# Altium PCB PCB Sensor Sentuh kapasitif 6.PcbDoc
Units mm, origin at the board's own origin, x right, y up, seen from the top; angles counter-clockwise.
Board outline 68.48 x 42.47 mm, 2 copper layers (Top Layer, Bottom Layer), stack 1.671 mm thick; 26 components, 32 nets, 106 pads, 31 vias.
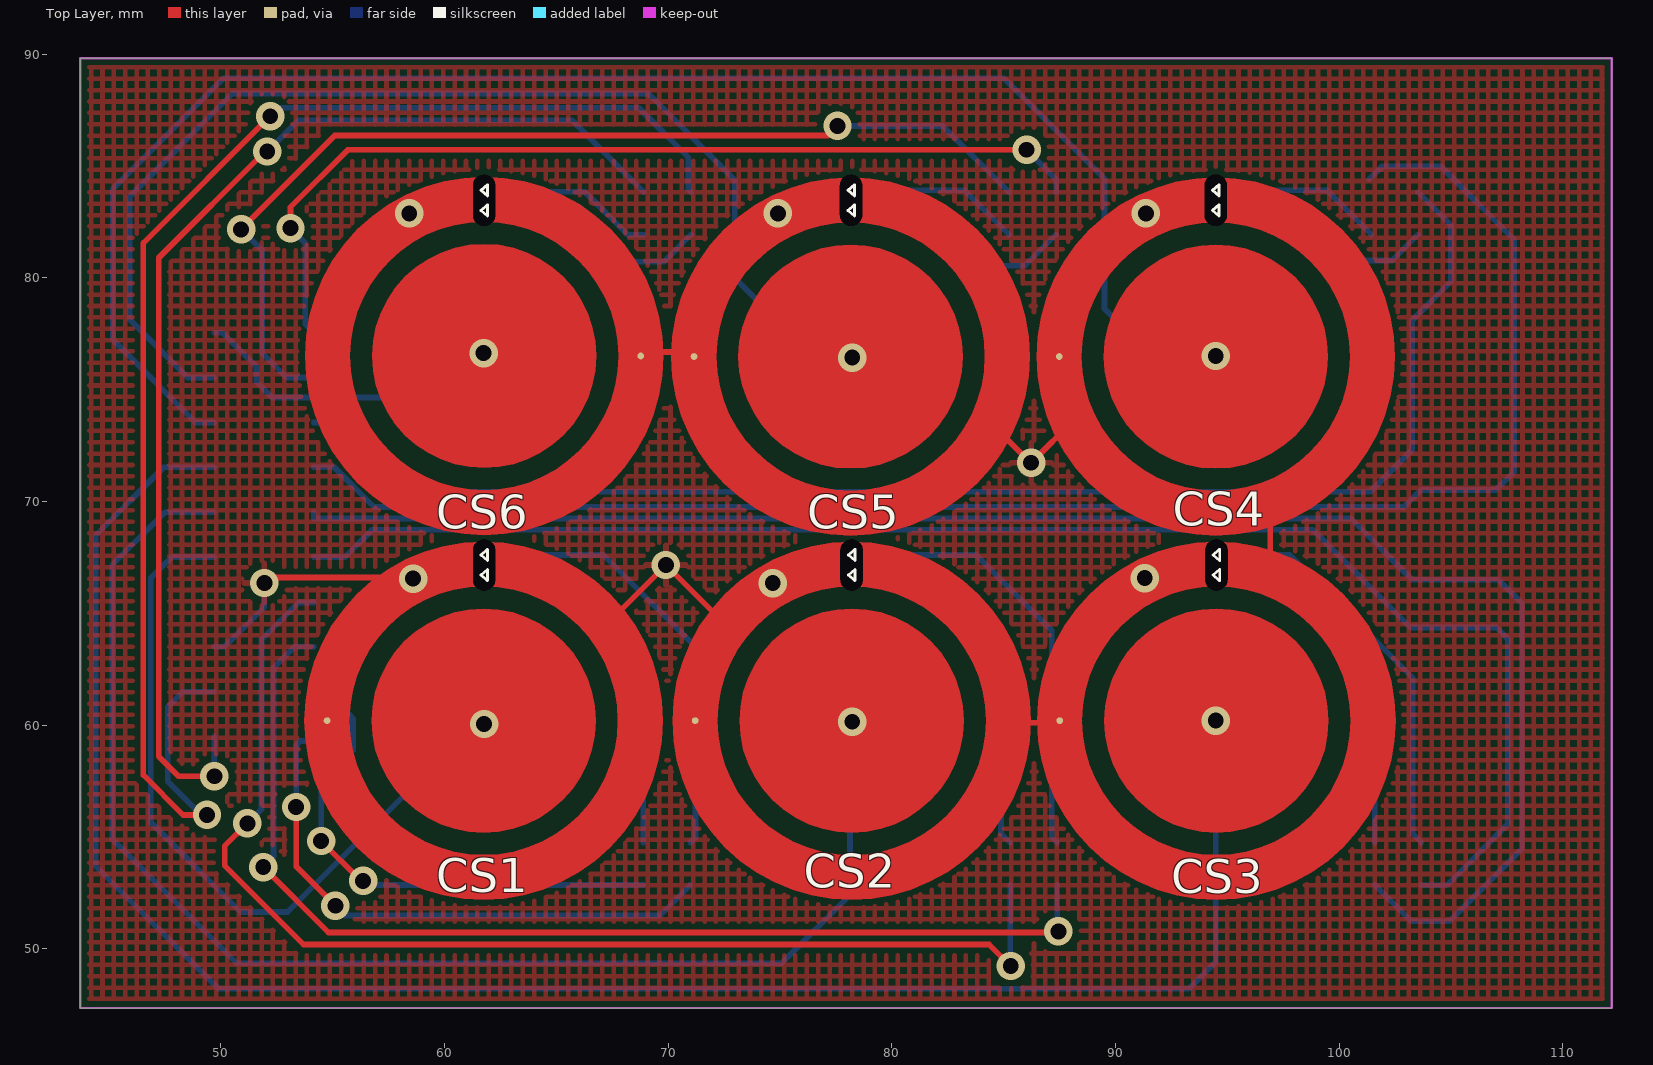
[diagram p0: Top Layer view]
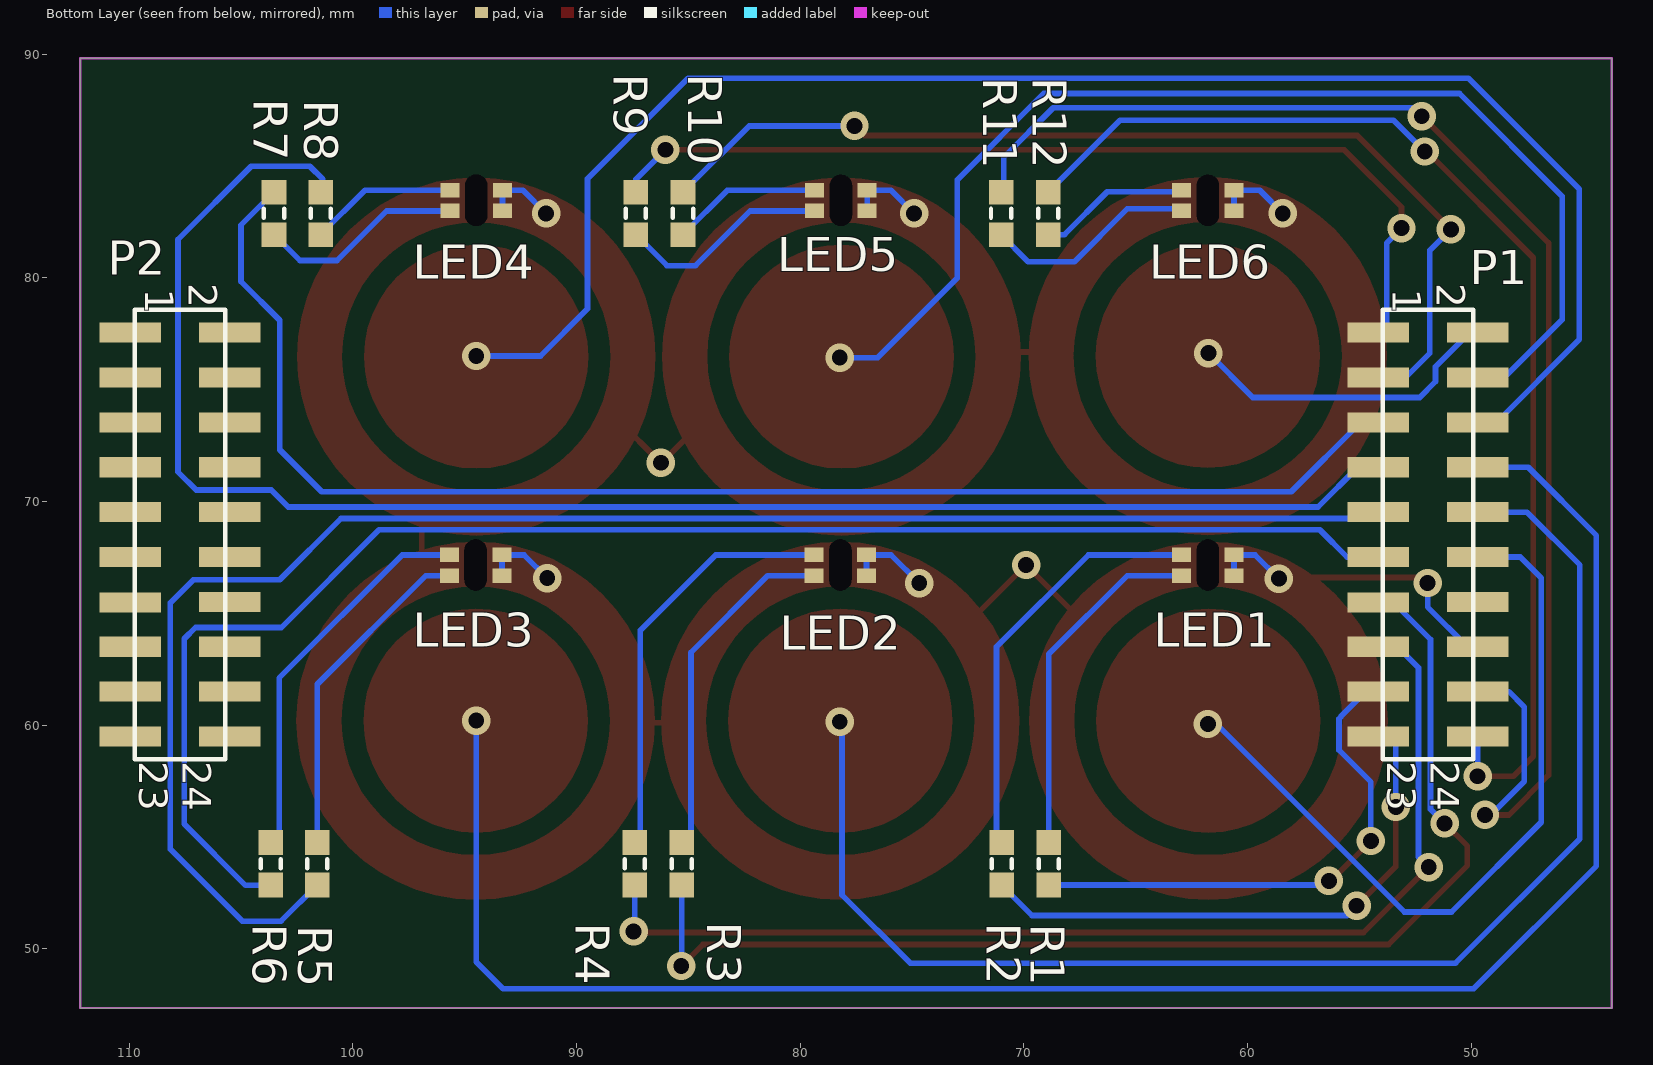
[diagram p1: Bottom Layer view, seen from below]
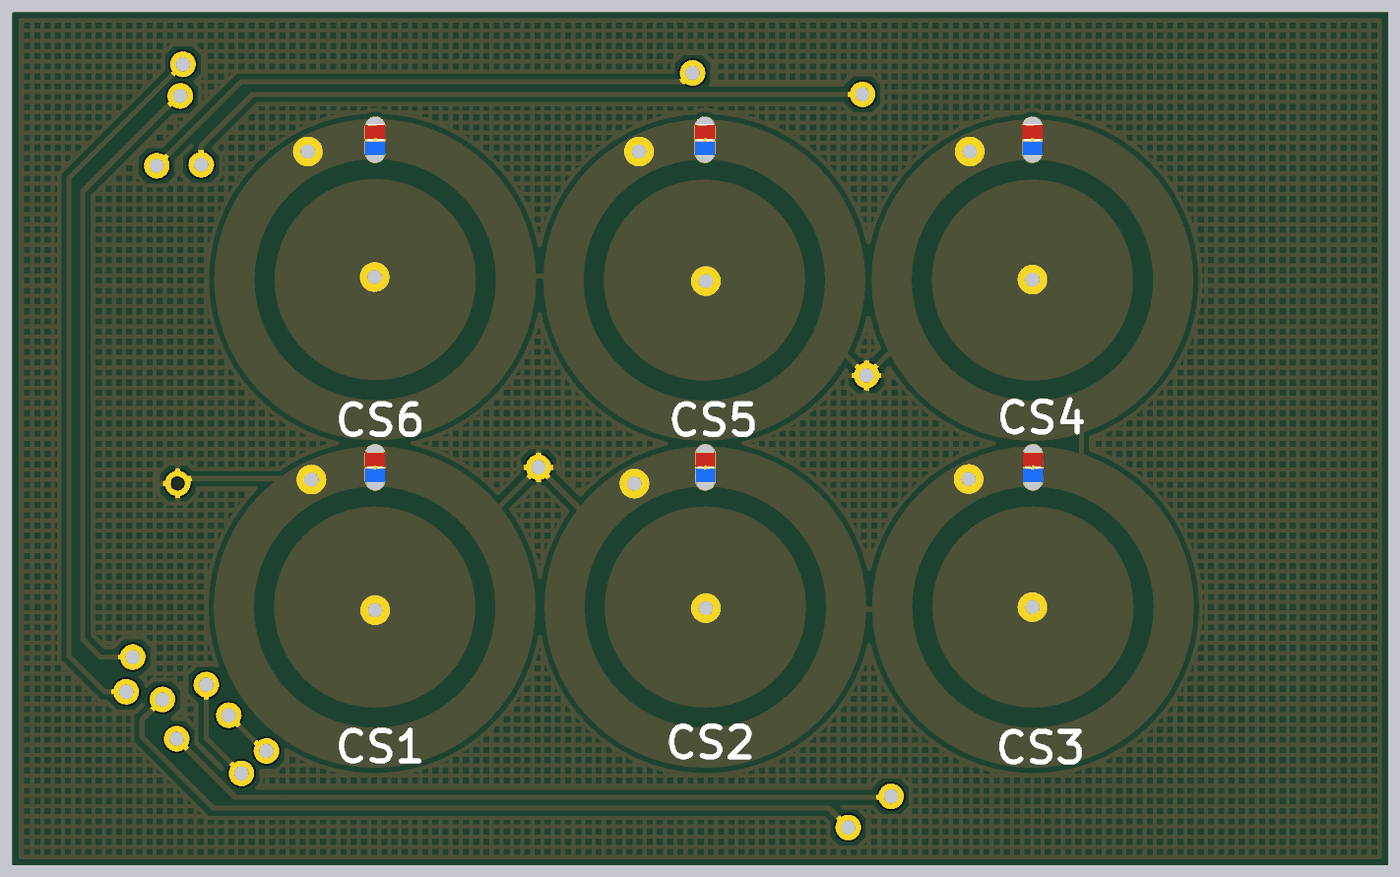
[diagram p2: 3D render of the assembled board from above, using the file's embedded part models]

## Layer stack, top to bottom
Top Solder: solder mask 0.0102, Solder Resist, Dk 3.5
Top Layer: signal copper 0.0356
Dielectric 1: dielectric 1.6, FR-4, Dk 4.8
Bottom Layer: signal copper 0.0356
Bottom Solder: solder mask 0.0102, Solder Resist, Dk 3.5

## Board outline
43.713,47.346 43.713,89.814 112.192,89.814 112.192,47.346

## Design rules (kind name [scope] priority, off if disabled: settings)
Clearance [All] p1: gap=0.254
PolygonConnect [All] p1: connectstyle=Relief reliefconductorwidth=0.254 reliefentries=4 polygonreliefangle="90 Angle" airgapwidth=0.254
RoutingVias [All] p1: holewidth=0.711 width=1.27 viastyle="Through Hole" minholewidth=0.711 minwidth=1.27 maxholewidth=0.711 maxwidth=1.27
SolderMaskExpansion [All] p1: expansion=0.102
Width [All] p1: maxlimit=0.254 minlimit=0.254 preferedwidth=0.254
30 further rules are at their usual default settings.

## Components (designator, comment, footprint, x,y, rotation, side; value= is the part's Value field where it differs from the comment)
CS1 "Mutual Ring mTouch Sensor" ? 61.747,60.198 r90 top locked
CS2 "Mutual Ring mTouch Sensor" ? 78.207,60.198 r90 top locked
CS3 "Mutual Ring mTouch Sensor" ? 94.513,60.198 r90 top locked
CS4 "Mutual Ring mTouch Sensor" ? 94.488,76.479 r90 top locked
CS5 "Mutual Ring mTouch Sensor" ? 78.156,76.479 r90 top locked
CS6 "Mutual Ring mTouch Sensor" ? 61.773,76.505 r270 top
LED1 "LTST-C195KGJRKT" LTST-BILED-15X16_LTST-C195KGJRKT(HOLE) 61.773,67.158 r270 top
LED2 "LTST-C195KGJRKT" LTST-BILED-15X16_LTST-C195KGJRKT(HOLE) 78.207,67.158 r270 top
LED3 "LTST-C195KGJRKT" LTST-BILED-15X16_LTST-C195KGJRKT(HOLE) 94.513,67.158 r270 top
LED4 "LTST-C195KGJRKT" LTST-BILED-15X16_LTST-C195KGJRKT(HOLE) 94.488,83.464 r270 top
LED5 "LTST-C195KGJRKT" LTST-BILED-15X16_LTST-C195KGJRKT(HOLE) 78.181,83.464 r270 top
LED6 "LTST-C195KGJRKT" LTST-BILED-15X16_LTST-C195KGJRKT(HOLE) 61.773,83.464 r270 top
P1 "Header 10x2" "HDR2X10 pitch 2mm male" 52.934,77.546 r270 bottom locked
P2 "Header 10x2" "HDR2X10 pitch 2mm male" 108.737,77.546 r270 bottom locked
R1 "Res1" RESC1608M 68.885,53.797 r90 bottom
R2 "Res1" RESC1608M 70.993,53.797 r90 bottom
R3 "Res1" RESC1608M 85.293,53.797 r90 bottom
R4 "Res1" RESC1608M 87.401,53.797 r90 bottom
R5 "Res1" RESC1608M 101.6,53.797 r90 bottom
R6 "Res1" RESC1608M 103.683,53.797 r90 bottom
R7 "Res1" RESC1608M 103.53,82.88 r270 bottom
R8 "Res1" RESC1608M 101.448,82.88 r270 bottom
R9 "Res1" RESC1608M 87.351,82.88 r270 bottom
R10 "Res1" RESC1608M 85.242,82.88 r270 bottom
R11 "Res1" RESC1608M 71.018,82.88 r270 bottom
R12 "Res1" RESC1608M 68.91,82.88 r270 bottom

## Footprints (in the part's own frame and the unit in brackets; to place one, negate y for a bottom-side part, rotate by r counter-clockwise, add the part's x,y. Pads: shape width x height; smd on the part's side, far side on the other; paste and mask are expansions set on the pad)
"HDR2X10 pitch 2mm male" [mm] "Connector; Header; 14x2 Position"
  rect 0.9x2.75 smd: 1(0,-1.219) 2(0,3.226) 3(2.007,-1.219) 4(2.007,3.226) 5(4.013,-1.219) 6(4.013,3.226) 7(6.02,-1.219) 8(6.02,3.226) 9(8.026,-1.219) 10(8.026,3.226) 11(10.033,-1.219) 12(10.033,3.226) 13(12.065,-1.219) 14(12.04,3.226) 15(14.046,-1.219) 16(14.046,3.226) 17(16.053,-1.219) 18(16.053,3.226) 19(18.059,-1.219) 20(18.059,3.226)
  silkscreen extent -1.02,-1.02 19.08,3.02, body extent -0.95,-2.22 19,4.28, height 6.46
LTST-BILED-15X16_LTST-C195KGJRKT(HOLE) [mm]
  rect 0x0 hole 1 slot 2.3 at 0 deg: 0(0,0)
  rect 0.65x0.85 smd far side: P$1(0.475,1.175) P$2(-0.45,1.175) P$3(0.475,-1.174) P$4(-0.45,-1.174)
  silkscreen extent -0.7,-0.15 0.7,0.15, body extent -0.79,-0.79 0.81,0.81
RESC1608M [mm] "Chip Resistor, Body 1.6x0.8mm, IPC Low Density"
  rect 1.1x1.1 smd: 1(-0.95,0) 2(0.95,0)
  silkscreen extent -0.2,-0.45 0.2,0.45, body extent -0.85,-0.48 0.85,0.48, height 0.6
? [mm]
  round 0.3 smd paste-0.15: 1(0,0) 2(0,7)
  Top Layer region: 0,8 0,8.012 -0.891,7.962 -1.777,7.812 -2.64,7.563 -3.47,7.219 -4.257,6.784 -4.989,6.265 -5.659,5.666 -6.258,4.996 -6.778,4.263 -7.213,3.477 -7.557,2.646 -7.805,1.783 -7.956,0.897 -8.006,0 -7.956,-0.897 -7.805,-1.783 -7.557,-2.646 -7.213,-3.477 -6.778,-4.263 -6.258,-4.996 -5.659,-5.666 -4.989,-6.265 -4.257,-6.784 -3.47,-7.219 -2.64,-7.563 -1.777,-7.812 -0.891,-7.962 0,-8.012 0,-8.012 0.891,-7.962 1.777,-7.812 2.64,-7.563 3.47,-7.219 4.257,-6.784 4.989,-6.265 5.659,-5.666 6.258,-4.996 6.778,-4.263 7.213,-3.477 7.557,-2.646 7.805,-1.783 7.956,-0.897 8.006,0 7.956,0.897 7.805,1.783 7.557,2.646 7.213,3.477 6.778,4.263 6.258,4.996 5.659,5.666 4.989,6.265 4.257,6.784 3.47,7.219 2.64,7.563 1.777,7.812 0.891,7.962 0,8.012 0,6 0,6.009 0.668,5.972 1.332,5.859 1.98,5.672 2.603,5.414 3.192,5.088 3.742,4.698 4.245,4.249 4.694,3.747 5.084,3.197 5.41,2.607 5.667,1.985 5.854,1.337 5.967,0.673 6.005,0 5.967,-0.673 5.854,-1.337 5.667,-1.985 5.41,-2.607 5.084,-3.197 4.694,-3.747 4.245,-4.249 3.742,-4.698 3.192,-5.088 2.603,-5.414 1.98,-5.672 1.332,-5.859 0.668,-5.972 0,-6.009 0,-6.009 -0.668,-5.972 -1.332,-5.859 -1.98,-5.672 -2.603,-5.414 -3.192,-5.088 -3.742,-4.698 -4.245,-4.249 -4.694,-3.747 -5.084,-3.197 -5.41,-2.607 -5.667,-1.985 -5.854,-1.337 -5.967,-0.673 -6.005,0 -5.967,0.673 -5.854,1.337 -5.667,1.985 -5.41,2.607 -5.084,3.197 -4.694,3.747 -4.245,4.249 -3.742,4.698 -3.192,5.088 -2.603,5.414 -1.98,5.672 -1.332,5.859 -0.668,5.972 0,6.009 0,8
  Top Layer region: 0,5 0,5.01 0.65,4.968 1.293,4.84 1.914,4.629 2.501,4.339 3.046,3.975 3.539,3.543 3.971,3.05 4.335,2.505 4.625,1.918 4.836,1.297 4.964,0.654 5.007,0 4.964,-0.654 4.836,-1.297 4.625,-1.918 4.335,-2.505 3.971,-3.05 3.539,-3.543 3.046,-3.975 2.501,-4.339 1.914,-4.629 1.293,-4.84 0.65,-4.968 0,-5.01 0,-5.01 -0.65,-4.968 -1.293,-4.84 -1.914,-4.629 -2.501,-4.339 -3.046,-3.975 -3.539,-3.543 -3.971,-3.05 -4.335,-2.505 -4.625,-1.918 -4.836,-1.297 -4.964,-0.654 -5.007,0 -4.964,0.654 -4.836,1.297 -4.625,1.918 -4.335,2.505 -3.971,3.05 -3.539,3.543 -3.046,3.975 -2.501,4.339 -1.914,4.629 -1.293,4.84 -0.65,4.968 0,5.01

## Part data
CS1 CS2 CS3 CS4 CS5 CS6: library part mTouchMutualRingSensor
LED1 LED2 LED3 LED4 LED5 LED6: "Green/Red 130%C2%B0 Water Clear 35/25 mcd 2 V 0605 Surface Mount Bi-Color LED"
P1 P2: "Header, 14-Pin, Dual row"
R1 R2 R3 R4 R5 R6 R7 R8 R9 R10 R11 R12: "Resistor"

## Via types
v1: diameter 1.27, hole 0.711, Top Layer to Bottom Layer, 31 vias

## Nets (pads, with @x,y where several pads share a name; then routed paths per layer and width w, separated by ;. In a path a pad name is that pad's centre, name@x,y a point inside that pad or via, vN(x,y) a via of type N, cw(c..) or ccw(c..) an arc to the next point about the centre after c; other vN are vias at no path point)
C1: CS1.1 P1.12 | length 34.2
  Bottom Layer w0.254: P1.12 47.803,67.513 46.863,66.573 46.863,55.651 50.876,51.638 52.984,51.638 61.392,60.046 v1(61.773,60.046)
C2: CS2.1 P1.10 | length 62.1
  Bottom Layer w0.254: P1.10 47.498,69.52 45.136,67.158 45.136,54.915 50.698,49.352 75.082,49.352 78.13,52.4 78.13,60.046 v1(78.232,60.147)
C3: CS3.1 P1.8 | length 85
  Bottom Layer w0.254: P1.8 47.447,71.526 44.399,68.478 44.399,53.696 49.886,48.209 93.294,48.209 94.488,49.403 v1(94.488,60.198)
C4: CS4.1 P1.6 | length 72.7
  Bottom Layer w0.254: P1.6 48.87,73.533 45.161,77.241 45.161,83.972 50.114,88.925 85.014,88.925 89.51,84.43 89.51,78.613 91.618,76.505 v1(94.488,76.505)
C5: CS5.1 P1.4 | length 52
  Bottom Layer w0.254: P1.4 48.514,75.539 45.923,78.13 45.923,83.642 50.521,88.24 69.113,88.24 72.974,84.379 72.974,79.985 76.53,76.429 v1(78.232,76.429)
C6: CS6.1 P1.2 | length 14.4
  Bottom Layer w0.254: P1.2 50.065,77.546 51.587,76.024 51.587,75.362 52.299,74.651 59.766,74.651 v1(61.747,76.632)
GND: CS1.2 CS2.2 CS3.2 CS4.2 CS5.2 CS6.2 LED1.P$3 LED1.P$4 LED2.P$3 LED2.P$4 LED3.P$3 LED3.P$4 LED4.P$3 LED4.P$4 LED5.P$3 LED5.P$4 LED6.P$3 LED6.P$4 P1.16 | length 53.3
  Top Layer w0.254: v1(51.943,66.353) 52.189,66.599 v1@58.42,66.599 ; 66.954,63.932 66.954,64.211 v1(69.901,67.158) 72.542,64.516 72.949,64.516 ; CS6.2 68.951,76.683 70.79,76.683 ; 70.739,60.096 70.841,59.995 ; 84.099,73.838 86.208,71.73 v1(86.233,71.73) 88.163,73.66 88.163,73.762 ; 84.912,60.096 87.147,60.096 87.198,60.147 ; 85.344,76.683 85.446,76.784 ; 96.672,69.545 96.926,69.291 96.926,66.929
  Bottom Layer w0.254: P1.16 50.165,63.5 51.943,65.278 v1(51.943,66.353) ; v1(58.42,82.88) 59.454,83.914 LED6.P$4 LED6.P$3 ; v1(58.598,66.548) 59.657,67.608 LED1.P$4 LED1.P$3 ; v1(74.676,66.345) 75.939,67.608 LED2.P$4 LED2.P$3 ; v1(74.905,82.88) 75.938,83.914 LED5.P$4 LED5.P$3 ; v1(91.313,66.573) 92.348,67.608 LED3.P$4 LED3.P$3 ; v1(91.364,82.88) 92.398,83.914 LED4.P$4 LED4.P$3
LED1B: P1.18 R11.1 | length 64.8
  Top Layer w0.254: v1(49.378,55.982) 48.311,55.982 46.533,57.76 46.533,81.559 52.197,87.224 v1(52.208,87.224)
  Bottom Layer w0.254: v1(49.378,55.982) 49.124,55.982 47.625,57.48 47.625,60.808 48.311,61.493 P1.18 ; v1(52.208,87.224) 52.589,87.605 68.682,87.605 70.891,85.395 70.891,83.957 R11.1
LED1R: P1.20 R12.1 | length 52.5
  Top Layer w0.254: v1(49.708,57.709) 48.108,57.709 47.219,58.598 47.219,80.899 v1@52.019,85.7
  Bottom Layer w0.254: v1(49.708,57.709) P1.20 ; v1(52.07,85.649) 53.467,87.046 65.695,87.046 R12.1
LED2B: P1.1 R9.1 | length 42.5
  Top Layer w0.254: v1(53.111,82.22) 53.111,83.16 55.677,85.725 v1(86.03,85.725)
  Bottom Layer w0.254: v1(53.111,82.22) 53.772,81.559 53.772,77.927 P1.1 ; v1(86.03,85.725) 87.351,84.404 R9.1
LED2R: P1.3 R10.1 | length 46.2
  Top Layer w0.254: v1(50.902,82.169) 55.093,86.36 77.14,86.36 v1(77.572,86.792)
  Bottom Layer w0.254: v1(50.902,82.169) 51.841,81.229 51.841,76.632 52.934,75.539 P1.3 ; v1(77.572,86.792) 82.281,86.792 R10.1
LED3B: P1.5 R7.1 | length 64
  Bottom Layer w0.254: P1.5 54.94,73.533 58.039,70.434 101.397,70.434 103.276,72.314 103.276,78.105 105.004,79.832 105.004,82.357 R7.1
LED3R: P1.7 R8.1 | length 73.5
  Bottom Layer w0.254: P1.7 55.067,71.526 56.845,69.748 102.895,69.748 103.657,70.51 107.01,70.51 107.823,71.323 107.823,81.712 104.546,84.988 101.93,84.988 101.346,84.404
LED4B: P1.9 R5.1 | length 75.4
  Bottom Layer w0.254: P1.9 54.153,69.24 100.533,69.24 103.276,66.497 107.137,66.497 108.166,65.468 108.166,54.445 104.953,51.232 103.215,51.232 R5.1
LED4R: P1.11 R6.1 | length 69.2
  Bottom Layer w0.254: P1.11 55.55,67.513 56.769,68.732 98.831,68.732 103.2,64.364 107.036,64.364 107.544,63.856 107.544,55.575 104.8,52.832 103.698,52.832 R6.1
LED5B: P1.13 R3.1 | length 54.5
  Top Layer w0.254: v1(51.181,55.601) 50.165,54.585 50.165,53.721 53.696,50.19 84.353,50.19 v1(85.319,49.225)
  Bottom Layer w0.254: v1(51.181,55.601) 51.816,56.236 51.816,63.83 53.467,65.481 P1.13 ; R3.1 85.293,49.251 v1(85.319,49.225)
LED5R: P1.15 R4.1 | length 50.2
  Top Layer w0.254: v1(51.892,53.645) 54.813,50.724 87.401,50.724 v1(87.452,50.775)
  Bottom Layer w0.254: v1(51.892,53.645) 52.349,54.102 52.349,62.56 53.289,63.5 P1.15 ; R4.1 87.401,50.825 v1(87.452,50.775)
LED6B: P1.17 R1.1 | length 23.5
  Top Layer w0.254: v1(54.483,54.813) 56.261,53.035 v1(56.363,53.035)
  Bottom Layer w0.254: P1.17 54.712,61.493 55.829,60.376 55.829,60.355 55.909,60.275 55.909,58.879 54.483,57.453 v1(54.483,54.813) ; v1(56.363,53.035) 56.642,53.035 56.83,52.847 R1.1
LED6R: P1.19 R2.1 | length 25.5
  Top Layer w0.254: v1(53.365,56.337) 53.365,53.67 v1(55.118,51.918)
  Bottom Layer w0.254: v1(53.365,56.337) 53.365,59.093 53.562,59.29 53.956,59.29 P1.19 ; v1(55.118,51.918) 55.55,51.486 69.631,51.486 R2.1
NetLED1_P$1: LED1.P$1 R1.2 | length 15.8
  Bottom Layer w0.254: LED1.P$1 65.372,66.683 68.885,63.17 R1.2
NetLED1_P$2: LED1.P$2 R2.2 | length 18.8
  Bottom Layer w0.254: LED1.P$2 67.114,67.608 71.222,63.5 71.222,54.976 R2.2
NetLED2_P$1: LED2.P$1 R3.2 | length 15.6
  Bottom Layer w0.254: LED2.P$1 81.45,66.683 84.887,63.246 84.887,55.154 R3.2
NetLED2_P$2: LED2.P$2 R4.2 | length 18.8
  Bottom Layer w0.254: LED2.P$2 83.776,67.608 87.147,64.237 87.147,55.001 R4.2
NetLED3_P$1: LED3.P$1 R5.2 | length 15
  Bottom Layer w0.254: LED3.P$1 96.741,66.683 101.6,61.824 R5.2
NetLED3_P$2: LED3.P$2 R6.2 | length 17.4
  Bottom Layer w0.254: LED3.P$2 97.797,67.608 103.302,62.103 103.302,55.128 R6.2
NetLED4_P$1: LED4.P$1 R7.2 | length 9.3
  Bottom Layer w0.254: LED4.P$1 98.494,82.989 100.711,80.772 102.372,80.772 R7.2
NetLED4_P$2: LED4.P$2 R8.2 | length 6.6
  Bottom Layer w0.254: LED4.P$2 99.463,83.914 R8.2
NetLED5_P$1: LED5.P$1 R9.2 | length 9.6
  Bottom Layer w0.254: LED5.P$1 82.238,82.989 84.684,80.543 85.964,80.543 R9.2
NetLED5_P$2: LED5.P$2 R10.2 | length 6.7
  Bottom Layer w0.254: LED5.P$2 83.259,83.914 R10.2
NetLED6_P$1: LED6.P$1 R11.2 | length 9.6
  Bottom Layer w0.254: LED6.P$1 63.042,83.083 65.38,83.083 67.742,80.721 69.809,80.721 R11.2
NetLED6_P$2: LED6.P$2 R12.2 | length 6.8
  Bottom Layer w0.254: LED6.P$2 63.016,83.845 66.269,83.845 68.184,81.93 R12.2
VCC: 
pads on no net: LED1.0 LED2.0 LED3.0 LED4.0 LED5.0 LED6.0 P1.14 P2.1 P2.2 P2.3 P2.4 P2.5 P2.6 P2.7 P2.8 P2.9 P2.10 P2.11 P2.12 P2.13 P2.14 P2.15 P2.16 P2.17 P2.18 P2.19 P2.20

## Polygon pours and split planes (outlines as drawn)
GND on Top Layer "Top Layer-No Net" (hatched 90Degree grid 0.508 track 0.203, remove dead copper, pour order 4): 43.713,89.814 112.192,89.814 112.192,47.346 43.713,47.346

## Keep-outs
Keep-Out Layer:
  lines w0.1: 43.713,47.346 112.192,47.346 112.192,62.357 112.192,89.814 43.713,89.814 43.713,62.357 43.713,47.346
  text "PCB sensor sentuh" at 38.532,94.869 h1.52

## Silkscreen, mask and mechanical layers (free items; w line width, h text height)
Drill Guide:
  text "Lobang utk led 1mm" at 38.329,91.948 h1.52
Mechanical 1:
  lines w0.1: 124.311,60.261 124.311,60.261 ; 35.811,44.261 35.811,44.261

## Dimensions
88.479,76.479 to 100.497,76.479 on Drill Guide
61.773,84.607 to 61.773,82.271 on Drill Guide
89.459,76.505 to 99.498,76.479 on Drill Guide
86.488,76.479 to 102.5,76.479 on Drill Guide
61.747,76.632 to 61.773,60.046 on Drill Guide
61.773,60.046 to 43.713,47.346 on Drill Guide
61.747,76.632 to 43.713,89.814 on Drill Guide
61.747,76.632 to 78.232,76.429 on Drill Guide
78.232,76.429 to 94.488,76.505 on Drill Guide
61.773,60.046 to 43.713,47.346 on Drill Guide
94.488,60.198 to 112.192,47.346 on Drill Guide

## Text inside footprints (layer, text, board x,y; h text height)
P1: Bottom Overlay "24" at 51.809,58.371 h1.27 r90; Bottom Overlay "23" at 53.759,58.371 h1.27 r90; Bottom Overlay "1" at 53.493,79.502 h1.27 r90; Bottom Overlay "2" at 51.537,79.756 h1.27 r90
P2: Bottom Overlay "24" at 107.612,58.371 h1.27 r90; Bottom Overlay "23" at 109.562,58.371 h1.27 r90; Bottom Overlay "1" at 109.296,79.502 h1.27 r90; Bottom Overlay "2" at 107.34,79.756 h1.27 r90